# EAGLE board placa taca 2.0 (EAGLE 9.4.1)
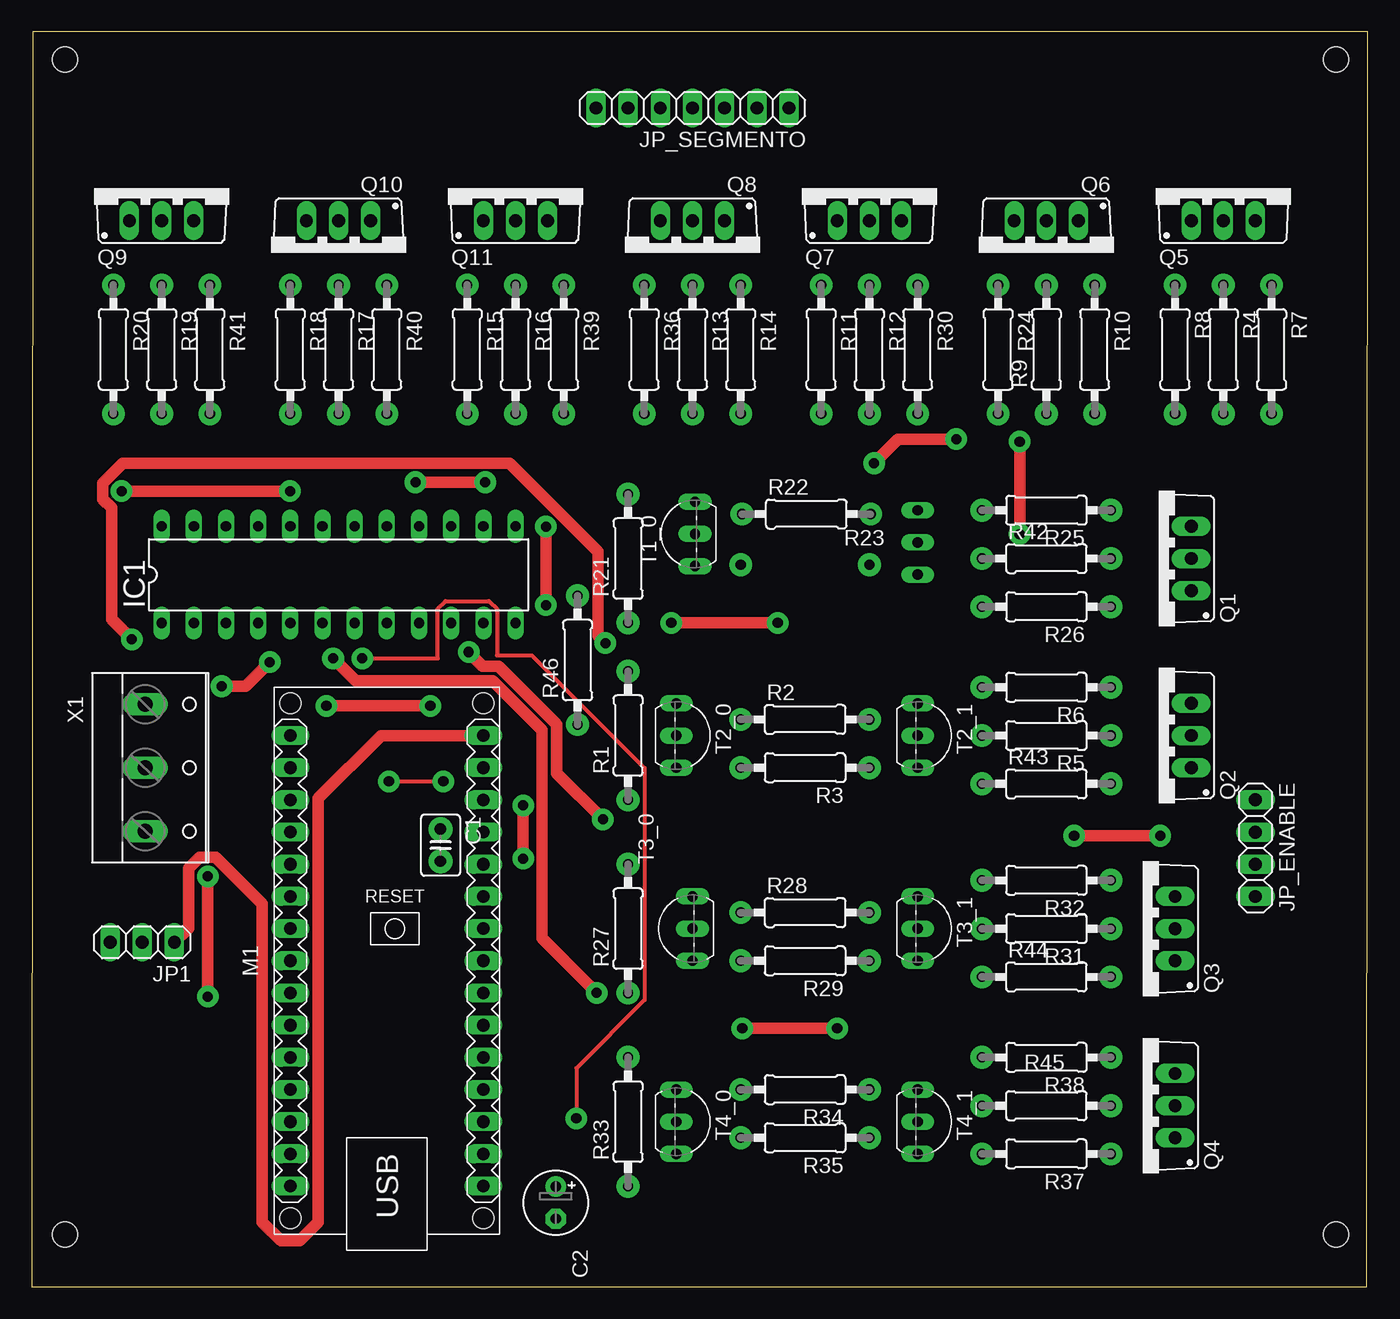
[diagram p0: board, top side]
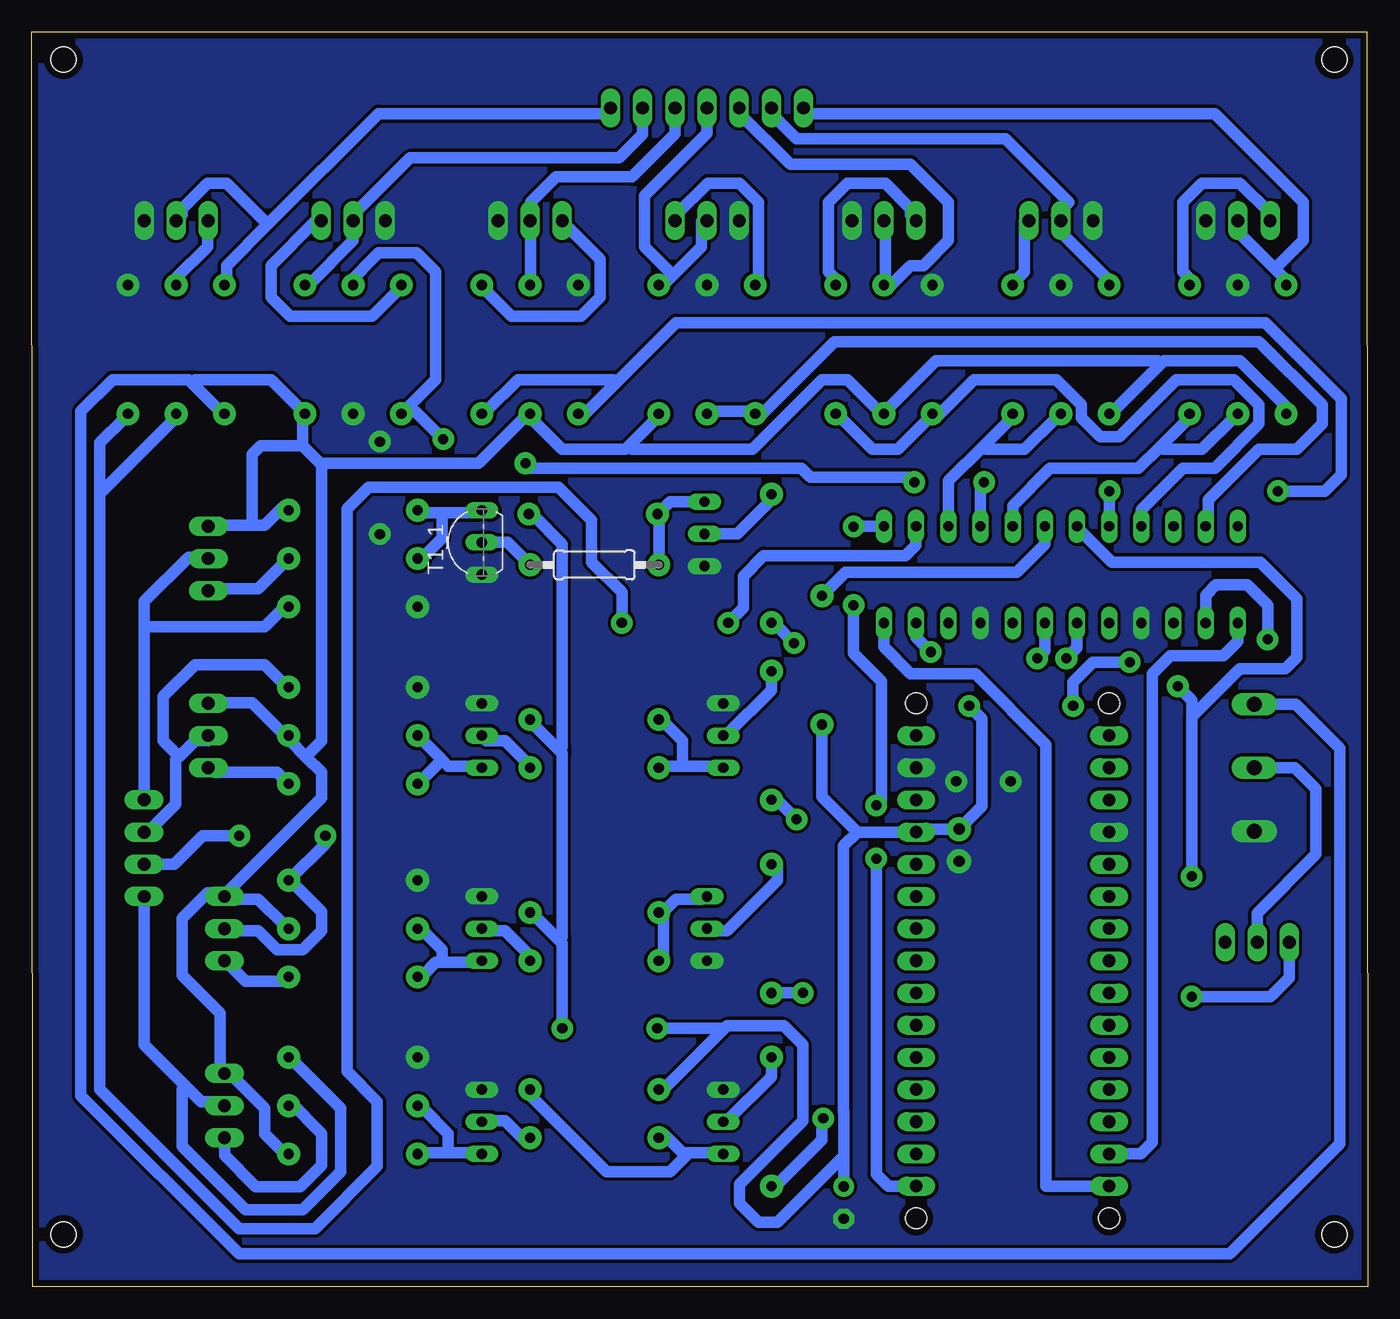
[diagram p1: board, bottom side, seen from below]

Size 105.49 x 99.06 mm. Coordinates in mm from the lower left corner, seen from the top.
Outline: 0,0 105.39,0 105.49,99.06 0.1,99.06 0,0
Copper layers (1*16): Top 0.035mm / dielectric 1.5mm / Bottom 0.035mm
Design rules "default *": minimum track width 0.3mm, minimum drill 0.35mm, track to track 10mil, track to pad 10mil, pad to pad 8mil, via to via 8mil, smd to smd 6mil, copper to edge 20mil, drill to drill 6mil, minimum pad ring 10mil, minimum via ring 8mil, stop-mask expansion 4mil, vias tented up to drill 0mil, thermal gap 10mil
Holes 2 mm at 2.64,96.85 102.97,96.85 102.97,4.14 2.64,4.14

## Footprints (pad centres in the part's own frame; a part is rotated, then mirrored left to right if it is on the bottom)
C025-030X050 = drill 0.9 pad 1.9: 1 -1.27,0; 2 1.27,0
E2,5-5 = drill 0.813 pad 1.6: + -1.27,0 | drill 0.813 pad 1.6 octagon: - 1.27,0
DIL24-3 = drill 0.813 long: 1 -13.97,-3.81; 2 -11.43,-3.81; 3 -8.89,-3.81; 4 -6.35,-3.81; 5 -3.81,-3.81; 6 -1.27,-3.81; 7 1.27,-3.81; 8 3.81,-3.81; 9 6.35,-3.81; 10 8.89,-3.81; 11 11.43,-3.81; 12 13.97,-3.81; 13 13.97,3.81; 14 11.43,3.81; 15 8.89,3.81; 16 6.35,3.81; 17 3.81,3.81; 18 1.27,3.81; 19 -1.27,3.81; 20 -3.81,3.81; 21 -6.35,3.81; 22 -8.89,3.81; 23 -11.43,3.81; 24 -13.97,3.81
1X03 = drill 1.016 long: 1 -2.54,0; 2 0,0; 3 2.54,0
1X04 = drill 1.016 long: 1 -3.81,0; 2 -1.27,0; 3 1.27,0; 4 3.81,0
1X07 = drill 1.016 long: 1 -7.62,0; 2 -5.08,0; 3 -2.54,0; 4 0,0; 5 2.54,0; 6 5.08,0; 7 7.62,0
ARDUINO-NANO-3.0 = drill 1 long: J1.1 17.78,7.62; J1.2 15.24,7.62; J1.3 12.7,7.62; J1.4 10.16,7.62; J1.5 7.62,7.62; J1.6 5.08,7.62; J1.7 2.54,7.62; J1.8 0,7.62; J1.9 -2.54,7.62; J1.10 -5.08,7.62; J1.11 -7.62,7.62; J1.12 -10.16,7.62; J1.13 -12.7,7.62; J1.14 -15.24,7.62; J1.15 -17.78,7.62; J2.1 17.78,-7.62; J2.2 15.24,-7.62; J2.3 12.7,-7.62; J2.4 10.16,-7.62; J2.5 7.62,-7.62; J2.6 5.08,-7.62; J2.7 2.54,-7.62; J2.8 0,-7.62; J2.9 -2.54,-7.62; J2.10 -5.08,-7.62; J2.11 -7.62,-7.62; J2.12 -10.16,-7.62; J2.13 -12.7,-7.62; J2.14 -15.24,-7.62; J2.15 -17.78,-7.62 | hole 1.651: -20.32,7.62; -20.32,-7.62; 20.32,-7.62; 20.32,7.62
TO220BV = drill 1.016 long: D 0,-2.54; G -2.54,-2.54; S 2.54,-2.54
0207/10 = drill 0.8 pad 1.8: 1 -5.08,0; 2 5.08,0
TO92-EBC = drill 0.813 long: B 0,-1.27; C 2.54,-1.27; E -2.54,-1.27
W237-103 = drill 1.194 long: 1 -5,-1.29; 2 0,-1.29; 3 5,-1.29

## Placement (x,y rotation side)
C1  [C025-030X050]  32.28,34.86 270 top
C2  [E2,5-5]  41.37,6.64 270 top
IC1  MAX7219CNG  [DIL24-3]  24.23,56.21 0 top
JP1  [1X03]  8.73,27.19 180 top
JP_ENABLE  [1X04]  96.62,34.62 270 top
JP_SEGMENTO  [1X07]  52.17,93.04 180 top
M1  ARDUINO-NANO-3.0  [ARDUINO-NANO-3.0]  28.04,25.73 90 top
Q1  [TO220BV]  89,57.48 90 top
Q2  [TO220BV]  89,43.51 90 top
Q3  [TO220BV]  87.73,28.27 90 top
Q4  [TO220BV]  87.73,14.3 90 top
Q5  IRF740  [TO220BV]  94.08,86.69 0 top
Q6  IRF740  [TO220BV]  80.11,81.61 180 top
Q7  IRF740  [TO220BV]  66.14,86.69 0 top
Q8  IRF740  [TO220BV]  52.17,81.61 180 top
Q9  IRF740  [TO220BV]  10.26,86.69 0 top
Q10  IRF740  [TO220BV]  24.23,81.61 180 top
Q11  IRF740  [TO220BV]  38.2,86.69 0 top
R1  2k  [0207/10]  47.09,43.51 90 top
R2  10k  [0207/10]  61.06,44.78 0 top
R3  2k  [0207/10]  61.06,40.97 180 top
R4  100  [0207/10]  94.08,73.99 270 top
R5  10k  [0207/10]  80.11,43.51 180 top
R6  10k  [0207/10]  80.11,47.32 180 top
R7  10k  [0207/10]  97.89,73.99 270 top
R8  10k  [0207/10]  90.27,73.99 270 top
R9  10k  [0207/10]  80.11,73.99 90 top
R10  10k  [0207/10]  83.92,73.99 270 top
R11  10k  [0207/10]  62.33,73.99 270 top
R12  10k  [0207/10]  66.14,73.99 270 top
R13  10k  [0207/10]  52.17,73.99 270 top
R14  10k  [0207/10]  55.98,73.99 270 top
R15  10k  [0207/10]  34.39,73.99 270 top
R16  10k  [0207/10]  38.2,73.99 270 top
R17  10k  [0207/10]  24.23,73.99 270 top
R18  10k  [0207/10]  20.42,73.99 270 top
R19  10k  [0207/10]  10.26,73.99 270 top
R20  10k  [0207/10]  6.45,73.99 270 top
R21  2k  [0207/10]  47.09,57.48 90 top
R22  10k  [0207/10]  61.16,60.99 0 top
R23  2k  [0207/10]  61.06,56.98 0 bottom
R24  100  [0207/10]  76.3,73.99 270 top
R25  10k  [0207/10]  80.11,61.29 180 top
R26  10k  [0207/10]  80.11,53.67 180 top
R27  2k  [0207/10]  47.09,28.27 90 top
R28  10k  [0207/10]  61.06,29.54 0 top
R29  2k  [0207/10]  61.06,25.73 180 top
R30  100  [0207/10]  69.95,73.99 270 top
R31  10k  [0207/10]  80.11,28.27 180 top
R32  10k  [0207/10]  80.11,32.08 180 top
R33  2k  [0207/10]  47.09,13.03 90 top
R34  10k  [0207/10]  61.06,15.57 180 top
R35  2k  [0207/10]  61.06,11.76 180 top
R36  100  [0207/10]  48.36,73.99 270 top
R37  10k  [0207/10]  80.11,10.49 180 top
R38  10k  [0207/10]  80.11,18.11 180 top
R39  100  [0207/10]  42.01,73.99 270 top
R40  100  [0207/10]  28.04,73.99 270 top
R41  100  [0207/10]  14.07,73.99 270 top
R42  100  [0207/10]  80.11,57.48 0 top
R43  100  [0207/10]  80.11,39.7 0 top
R44  100  [0207/10]  80.11,24.46 0 top
R45  100  [0207/10]  80.11,14.3 0 top
R46  10k  [0207/10]  43.1,49.46 90 top
T1_0  [TO92-EBC]  51.1,59.42 90 top
T1_1  [TO92-EBC]  71.22,58.75 90 bottom
T2_0  [TO92-EBC]  52.17,43.51 270 top
T2_1  [TO92-EBC]  71.22,43.51 270 top
T3_0  [TO92-EBC]  50.9,28.27 90 top
T3_1  [TO92-EBC]  71.22,28.27 270 top
T4_0  [TO92-EBC]  52.17,13.03 270 top
T4_1  [TO92-EBC]  71.22,13.03 270 top
X1  [W237-103]  10.26,40.97 270 top

## Library data of the parts
C1 C2 R1-R46 = rcl
IC1 = maxim; MF: MAXIM; MPN: MAX7219CNG; OC_FARNELL: 1523914; OC_NEWARK: 34C4018
JP1 JP_ENABLE JP_SEGMENTO = pinhead
M1 = diy-modules
Q1-Q11 = transistor-power
T1_0 T1_1 T2_0 T2_1 T3_0 T3_1 T4_0 T4_1 = transistor-neu-to92
X1 = con-wago-500; MPN: 237-103; OC_FARNELL: unknown; OC_NEWARK: 18M7116

## Nets
3V3: M1.J2.14
5V: C1.1 C2.+ IC1.19 JP1.3 M1.J2.4 R2.2 R22.2 R28.2 R34.2 R46.1
A_IN: IC1.14 R4.2 R7.2
A_OUT: JP_SEGMENTO.1 Q5.D R8.1
B_IN: IC1.16 R9.2 R24.2
B_OUT: JP_SEGMENTO.2 Q6.D R10.1
C_IN: IC1.20 R11.2 R30.2
C_OUT: JP_SEGMENTO.3 Q7.D R12.1
CLK: IC1.13 M1.J2.15
CS: IC1.12 M1.J1.15
D_IN: IC1.23 R13.2 R36.2
D_OUT: JP_SEGMENTO.4 Q8.D R14.1
E_IN: IC1.21 R15.2 R39.2
E_OUT: JP_SEGMENTO.5 Q11.D R16.1
EN_1_IN: IC1.2 R21.1
EN_1_OUT: JP_ENABLE.1 Q1.D R26.1
EN_2_IN: IC1.11 R1.1
EN_2_OUT: JP_ENABLE.2 Q2.D R6.1
EN_3_IN: IC1.6 R27.1
EN_3_OUT: JP_ENABLE.3 Q3.D R32.1
EN_4_IN: IC1.7 R33.1
EN_4_OUT: JP_ENABLE.4 Q4.D R38.1
F_IN: IC1.15 R17.2 R40.2
F_OUT: JP_SEGMENTO.6 Q10.D R18.1
G_IN: IC1.17 R19.2 R41.2
G_OUT: JP_SEGMENTO.7 Q9.D R20.1
GND: C1.2 C2.- IC1.4 IC1.9 M1.J1.4 M1.J2.2 Q5.S Q6.S Q7.S Q8.S Q9.S Q10.S Q11.S R6.2 R7.1 R9.1 R11.1 R13.1 R15.1 R17.1 R19.1 R26.2 R32.2 R38.2 T1_0.E T1_1.E T2_0.E T2_1.E T3_0.E T3_1.E T4_0.E T4_1.E X1.3
MOSI: IC1.1 M1.J1.14
N$1: R1.2 T2_0.B
N$2: R2.1 R3.2 T2_0.C
N$3: R3.1 T2_1.B
N$4: R5.2 R43.1 T2_1.C
N$5: Q5.G R4.1
N$6: Q6.G R24.1
N$7: Q7.G R30.1
N$8: Q8.G R36.1
N$9: Q1.G R42.2
N$10: Q10.G R40.1
N$11: Q9.G R41.1
N$12: Q2.G R43.2
N$13: Q3.G R44.2
N$14: Q4.G R45.2
N$15: IC1.18 R46.2
N$16: Q11.G R39.1
N$21: JP1.1 M1.J2.1
N$29: R21.2 T1_0.B
N$30: R22.1 R23.2 T1_0.C
N$31: R23.1 T1_1.B
N$32: R25.2 R42.1 T1_1.C
N$36: R27.2 T3_0.B
N$37: R28.1 R29.2 T3_0.C
N$38: R29.1 T3_1.B
N$39: R31.2 R44.1 T3_1.C
N$43: R33.2 T4_0.B
N$44: R34.1 R35.2 T4_0.C
N$45: R35.1 T4_1.B
N$46: R37.2 R45.1 T4_1.C
V_LOGIC: JP1.2 X1.2
VCC: Q1.S Q2.S Q3.S Q4.S R5.1 R8.2 R10.2 R12.2 R14.2 R16.2 R18.2 R20.2 R25.1 R31.1 R37.1 X1.1

## Tracks (layer width: path | path; a pad name or v marks a point on that pad's centre or on a via)
5V  (via drill 0.8 pad 1.7)
  Top 0.9: v23.27,45.85 v31.48,45.85 | v13.9,32.4 v13.9,22.9 | v15,47.4 16.9,47.4 v18.8,49.3 | v56.1,20.4 v63.6,20.4
  Bottom 0.9: 63.85,27.35 66.1,29.6 R28.2 | 63.85,27.35 63.6,27.1 v63.6,20.4 | 56.1,15.6 R34.2 55.6,15.6 50.8,20.4 | 63.85,42.35 63.6,42.1 63.6,27.6 63.85,27.35 | 63.85,42.35 66.1,44.6 R2.2 | 63.85,42.35 63.6,42.6 63.6,58.6 65.92,60.92 66.17,60.92 R22.2 | IC1.19 22.6,59.6 20.2,57.2 8.5,57.2 5.6,54.3 5.6,49.7 6.5,48.8 10.1,48.8 13.9,45 | 41.37,10.33 46.6,5.1 48.1,5.1 49.6,6.6 49.6,8.1 44.6,13.1 44.6,19.1 46.1,20.6 50.6,20.6 50.8,20.4 | C2.+ 41.37,10.33 | 41.37,10.33 41.37,13.83 41.4,13.8 41.4,34.8 40.31,35.89 | v31.48,45.85 30.48,44.85 30.48,37.93 C1.1 35.42,36.13 M1.J2.4 40.31,35.89 | 40.31,35.89 43.1,38.68 R46.1 | v13.9,32.4 13.9,45 | JP1.3 6.2,24.4 7.7,22.9 v13.9,22.9 | v15,47.4 13.9,46.3 13.9,45 | v18.8,49.3 21.7,49.3 23.27,47.73 v23.27,45.85 | v56.1,20.4 50.8,20.4
A_IN  (via drill 0.8 pad 1.7)
  Top 0.9: v50.5,52.4 v58.9,52.4
  Bottom 0.9: 100.1,62.6 100.1,66.6 98.1,68.6 R7.2 | 100.1,62.6 100.1,15.6 89.1,4.6 83.1,4.6 78.2,9.5 78.2,14.6 80.6,17 80.6,61.4 78.9,63.1 63.9,63.1 61.3,60.5 61.3,57.2 58.9,54.8 v58.9,52.4 | 100.1,62.6 94.1,68.6 R4.2 | IC1.14 35.66,58.54 36.5,57.7 47.7,57.7 49.3,56.1 49.3,53.6 v50.5,52.4
A_OUT
  Bottom 0.9: 86.85,83.85 90.1,80.6 90.1,79.1 R8.1 | 86.85,83.85 78.1,92.6 60.1,92.6 JP_SEGMENTO.1 | 86.85,83.85 90.1,87.1 91.6,87.1 93.6,85.1 93.6,84.6 Q5.D
B_IN  (via drill 0.8 pad 1.7)
  Top 0.9: v35.8,63.5 v30.3,63.5 | v66.5,65 68.4,66.9 v73,66.9
  Bottom 0.9: 76.1,69.1 73.6,71.6 73.6,80.1 75.1,81.6 78.1,81.6 80.6,79.1 R9.2 | 76.1,69.1 R24.2 | v73,66.9 75.2,69.1 76.1,69.1 | v66.5,65 66.1,64.6 44.7,64.6 44,63.9 36.2,63.9 v35.8,63.5 | IC1.16 30.58,63.22 v30.3,63.5
B_OUT
  Bottom 0.9: R10.1 83.6,79.1 80.1,82.6 80.1,84.1 Q6.D 80.1,84.6 75.6,89.1 59.1,89.1 57.25,90.95 JP_SEGMENTO.2
C_IN  (via drill 0.8 pad 1.7)
  Top 0.9: v20.4,62.8 v7.1,62.8
  Bottom 0.9: 59.35,71.35 62.1,68.6 R11.2 | 59.35,71.35 54.6,76.1 8.1,76.1 2.1,70.1 2.1,64.1 3.4,62.8 v7.1,62.8 | R30.2 69.6,69.1 67.1,71.6 59.6,71.6 59.35,71.35 | v20.4,62.8 20.42,62.78 IC1.20
C_OUT
  Bottom 0.9: R12.1 66.1,79.1 66.1,84.1 Q7.D 66.1,84.6 66.1,85.6 64.1,87.6 58.1,87.6 54.71,90.99 JP_SEGMENTO.3
CLK  (via drill 0.8 pad 1.7)
  Top 0.9: v40.6,60 v40.6,53.8 | v38.8,38 v38.8,33.8
  Bottom 0.9: M1.J2.15 37.85,7.95 38.8,8.9 v38.8,33.8 | v40.6,53.8 40.6,50 38.4,47.8 38.4,38.4 v38.8,38 | IC1.13 40.58,60.02 v40.6,60
CS
  Bottom 0.9: IC1.12 38.2,50.5 36.1,48.4 31,48.4 25.4,42.8 25.4,7.95 M1.J1.15
D_IN
  Bottom 0.9: R13.2 52.1,69.1 48.6,69.1 R36.2 48.1,68.6 42.1,74.6 8.6,74.6 3.6,69.6 3.6,68.1 5.6,66.1 8.6,66.1 12.6,62.1 12.6,60.22 IC1.23
D_OUT
  Bottom 0.9: 54.85,79.85 55.6,79.1 R14.1 | 54.85,79.85 52.6,82.1 52.6,84.1 Q8.D | 54.85,79.85 57.1,82.1 57.1,86.1 52.17,91.03 JP_SEGMENTO.4
E_IN
  Bottom 0.9: R39.2 41.6,68.6 39.1,66.1 37.1,66.1 34.6,68.6 R15.2 34.1,68.6 31.1,71.6 24.6,71.6 22.6,69.6 22.6,68.6 21.1,67.1 19.6,67.1 15.1,71.6 10.6,71.6 8.6,69.6 8.6,68.1 12.1,64.6 14.6,64.6 17.88,61.32 IC1.21
E_OUT
  Bottom 0.9: Q11.D 38.1,84.1 38.1,79.1 R16.1 38.1,78.6 36.1,80.6 35.1,80.6 33.1,82.6 33.1,85.6 36.1,88.6 45.6,88.6 49.6,92.6 JP_SEGMENTO.5
EN_1_IN  (via drill 0.8 pad 1.7)
  Top 0.9: v45.3,50.8 44.7,51.4 44.7,58.02 37.72,65 7.18,65 5.6,63.42 5.6,62.18 6.3,61.47 6.3,61.4 6.3,52.7 v7.9,51.1
  Bottom 0.9: IC1.2 12.8,54.6 12,55.4 9.5,55.4 7.9,53.8 v7.9,51.1 | v45.3,50.8 46.9,52.4 R21.1
EN_1_OUT
  Bottom 0.9: 96.6,52.1 96.6,54.1 93.1,57.6 91.6,57.6 Q1.D | 96.6,52.1 96.6,38.6 JP_ENABLE.1 | 96.6,52.1 87.1,52.1 85.6,53.6 R26.1
EN_2_IN  (via drill 0.8 pad 1.7)
  Top 0.9: v45.1,36.9 41.46,40.54 41.46,44.41 36.88,48.99 35.61,48.99 v34.5,50.1
  Bottom 0.9: IC1.11 35.66,51.26 v34.5,50.1 | v45.1,36.9 46.63,38.43 R1.1
EN_2_OUT
  Bottom 0.9: 93.85,41.85 92.6,43.1 91.6,43.1 Q2.D | 93.85,41.85 94.1,41.6 94.1,38.1 96.1,36.1 96.6,36.1 JP_ENABLE.2 | 93.85,41.85 95.1,43.1 95.1,46.6 92.6,49.1 87.1,49.1 85.6,47.6 R6.1
EN_3_IN  (via drill 0.8 pad 1.7)
  Top 0.9: v44.6,23.2 40.3,27.5 40.3,43.93 36.4,47.83 25.57,47.83 v23.8,49.6
  Bottom 0.9: IC1.6 22.96,50.44 v23.8,49.6 | v44.6,23.2 R27.1
EN_3_OUT  (via drill 0.8 pad 1.7)
  Top 0.9: v82.3,35.6 v89.1,35.6
  Bottom 0.9: Q3.D 90.1,28.1 87.6,28.1 86.1,26.6 84.1,26.6 82.6,28.1 82.6,29.6 85.1,32.1 R32.1 82.3,34.97 v82.3,35.6 | v89.1,35.6 92,35.6 94.25,33.35 JP_ENABLE.3
EN_4_IN  (via drill 0.8 pad 1.7)
  Top 0.3: v43,13.3 43,17.26 48.39,22.65 48.39,40.93 39.48,49.84 36.72,49.84 36.72,53.5 36.1,54.12 32.68,54.12 32.06,53.5 32.06,49.6 v26.1,49.6
  Bottom 0.9: R33.1 46.6,8.1 43.1,11.6 43.1,13.2 v43,13.3 | IC1.7 25.5,50.2 v26.1,49.6
EN_4_OUT
  Bottom 0.9: 93.35,15.85 96.6,19.1 96.6,30.6 JP_ENABLE.4 | 93.35,15.85 92.1,14.6 90.6,14.6 Q4.D | R38.1 85.1,18.1 81.1,14.1 81.1,9.1 84.1,6.1 88.6,6.1 93.6,11.1 93.6,15.6 93.35,15.85
F_IN
  Bottom 0.9: 30.35,66.35 28.1,68.6 R40.2 | 30.35,66.35 33.1,63.6 33.1,60.1 IC1.15 | R17.2 24.6,68.6 27.1,66.1 30.1,66.1 30.35,66.35
F_OUT
  Bottom 0.9: R18.1 20.1,79.1 24.1,83.1 24.1,84.1 Q10.D 24.6,84.6 23.6,85.6 28.6,90.6 45.1,90.6 47.09,92.59 JP_SEGMENTO.6
G_IN
  Bottom 0.9: 16.35,66.35 14.1,68.6 14.1,68.88 R41.2 | 16.35,66.35 18.1,64.6 25.1,64.6 28.04,61.66 IC1.17 | 16.35,66.35 16.1,66.1 13.1,66.1 10.6,68.6 10.57,68.6 R19.2
G_OUT
  Bottom 0.9: 7.35,80.35 5.1,82.6 5.1,85.6 12.1,92.6 44.1,92.6 JP_SEGMENTO.7 | Q9.D 10.26,83.26 7.35,80.35 | R20.1 6.45,79.45 7.35,80.35
GND  (via drill 0.8 pad 1.7)
  Top 0.3: v28.2,39.9 v32.5,39.9
  Top 0.9: v78,66.7 v78,59.4
  pour Bottom (no thermals): 0.1,99.39 105.51,99.39 105.51,1.6 103.34,-0.57 1,-0.57 -1.17,1.6 -1.17,98.12
MOSI
  Bottom 0.9: IC1.1 10.26,50.94 11.4,49.8 15.6,49.8 17,48.4 17,11.4 17.91,10.49 M1.J1.14
N$1
  Bottom 0.9: T2_0.B 50.6,43.6 47.1,47.1 47.1,48.1 R1.2
N$2
  Bottom 0.9: 54.1,41.1 55.6,41.1 R3.2 | 54.1,41.1 51.1,41.1 T2_0.C | 54.1,41.1 54.1,43.1 55.6,44.6 R2.1
N$3
  Bottom 0.9: T2_1.B 69.6,43.1 68.1,43.1 66.1,41.1 R3.1
N$4
  Bottom 0.9: 73.1,41.6 74.6,43.1 R5.2 | 73.1,41.6 72.6,41.1 70.1,41.1 T2_1.C | 73.1,41.6 74.6,40.1 R43.1
N$5
  Bottom 0.9: Q5.G 91.6,84.1 91.6,82.1 94.1,79.6 94.1,79.1 R4.1
N$6
  Bottom 0.9: Q6.G 83.1,84.1 86.6,80.6 86.6,78.1 85.1,76.6 78.6,76.6 76.6,78.6 R24.1
N$7
  Bottom 0.9: Q7.G 63.6,84.1 60.6,81.1 60.6,78.1 62.1,76.6 67.6,76.6 69.6,78.6 R30.1
N$8
  Bottom 0.9: Q8.G 54.6,84.6 52.1,87.1 49.6,87.1 48.1,85.6 48.1,79.1 R36.1
N$9
  Bottom 0.9: Q1.G 91.1,55.1 87.6,55.1 85.6,57.1 R42.2
N$10
  Bottom 0.9: Q10.G 27.1,84.1 27.1,80.1 28.1,79.1 R40.1
N$11
  Bottom 0.9: Q9.G 7.72,84.72 10.1,87.1 13.1,87.1 14.6,85.6 14.6,80.1 14.07,79.57 R41.1
N$12
  Bottom 0.9: Q2.G 91.1,40.6 86.1,40.6 85.6,40.1 R43.2
N$13
  Bottom 0.9: Q3.G 90.1,25.6 88.6,24.1 85.6,24.1 R44.2
N$14
  Bottom 0.9: Q4.G 90.27,10.37 87.8,7.9 84.3,7.9 82.6,9.6 82.6,12.1 85.1,14.6 R45.2
N$15
  Bottom 0.9: IC1.18 25.5,58.6 27.7,56.4 41.24,56.4 R46.2
N$16
  Bottom 0.9: Q11.G 36.1,84.6 36.1,85.1 38.1,87.1 41.1,87.1 42.6,85.6 42.6,80.1 41.6,79.1 R39.1
N$21
  Top 0.9: M1.J2.1 27.59,43.51 22.63,38.55 22.63,5.1 21.16,3.63 19.68,3.63 18.21,5.1 18.21,30.22 14.52,33.9 13.28,33.9 12.4,33.02 12.4,28.32 JP1.1
N$29
  Bottom 0.9: R21.2 47.1,62.1 49.78,59.42 T1_0.B
N$30
  Bottom 0.9: T1_0.C 55.11,61.96 R22.1 55.98,60.89 R23.2
N$31
  Bottom 0.9: R23.1 67.91,58.75 T1_1.B
N$32
  Bottom 0.9: 73.1,61.1 74.6,61.1 R25.2 | 73.1,61.1 70.1,61.1 T1_1.C | 73.1,61.1 73.1,59.1 74.6,57.6 R42.1
N$36
  Bottom 0.9: T3_0.B 52.1,28.1 50.6,28.1 46.6,32.1 46.6,33.1 R27.2
N$37
  Bottom 0.9: T3_0.C 52.6,30.6 54.6,30.6 55.6,29.6 R28.1 55.6,29.1 55.6,26.1 R29.2
N$38
  Bottom 0.9: T3_1.B 69.6,28.1 68.1,28.1 66.1,26.1 R29.1
N$39
  Bottom 0.9: 73.1,25.6 73.6,25.6 74.6,24.6 R44.1 | 73.1,25.6 70.1,25.6 T3_1.C | 73.1,25.6 73.1,26.6 74.6,28.1 R31.2
N$43
  Bottom 0.9: T4_0.B 50.6,13.1 47.1,16.6 R33.2
N$44
  Bottom 0.9: 53.6,10.6 54.1,10.6 55.6,12.1 R35.2 | 53.6,10.6 51.1,10.6 T4_0.C | 53.6,10.6 55.1,9.1 60.1,9.1 66.1,15.1 R34.1
N$45
  Bottom 0.9: T4_1.B 69.6,13.1 68.1,13.1 66.6,11.6 R35.1
N$46
  Bottom 0.9: 72.6,10.6 74.6,10.6 R37.2 | 72.6,10.6 70.1,10.6 T4_1.C | 72.6,10.6 72.6,12.1 74.6,14.1 R45.1
V_LOGIC
  Bottom 0.9: 8.6,40.6 X1.2 5.77,40.97 4.1,39.3 4.1,34.13 8.73,29.5 JP1.2
VCC
  Bottom 0.9: R37.1 85.6,10.6 87.1,12.1 87.1,14.1 89.6,16.6 90.1,16.6 Q4.S 90.6,17.1 90.6,21.6 93.6,24.6 93.6,29.1 91.6,31.1 90.6,31.1 Q3.S | Q3.S 90.1,30.6 87.6,30.6 85.6,28.6 R31.1 | Q2.S 91.1,46.1 88.1,46.1 85.6,43.6 R5.1 85.1,43.1 83.85,41.85 | 83.85,41.85 82.6,40.6 82.6,38.6 90.1,31.1 Q3.S | 16.35,72.85 20.1,69.1 R18.2 | 16.35,72.85 16.1,73.1 10.1,73.1 6.45,69.45 R20.2 | 16.35,72.85 16.6,73.1 34.1,73.1 38.1,69.1 R16.2 38.6,69.1 41.1,71.6 43.1,71.6 48.6,66.1 58.1,66.1 58.35,66.35 | 58.35,66.35 58.6,66.1 63.6,66.1 66.1,68.6 R12.2 66.6,68.6 70.2,65 82.6,65 | 58.35,66.35 56.1,68.6 R14.2 | 88.1,60.1 87.1,60.1 85.6,61.6 R25.1 | 88.1,60.1 91.1,60.1 Q1.S | 83.85,41.85 82.6,43.1 82.6,65 | 92.85,71.35 90.6,69.1 R8.2 | 92.85,71.35 93.1,71.6 99.1,71.6 101.6,69.1 101.6,15.1 89.1,2.6 10.9,2.6 2.2,11.3 2.2,42.5 5.67,45.97 X1.1 9.1,45.6 | 92.85,71.35 92.6,71.6 86.6,71.6 84.1,69.1 R10.2 84.1,68.73 84.1,66.4 | 82.6,65 82.7,65 84.1,66.4 | 84.1,66.4 87.4,66.4 88.1,65.7 88.1,60.1